# Altium PCB Controller.PcbDoc
Units mm, origin at the board's own origin, x right, y up, seen from the top; angles counter-clockwise.
Board outline 357.5 x 182.65 mm, 4 copper layers (Top Layer, Signal Layer 1, Signal Layer 2, Bottom Layer), stack 1.55 mm thick; 171 components, 66 nets, 596 pads, 118 vias.
Unrouted connection lines stored in the file: 415.
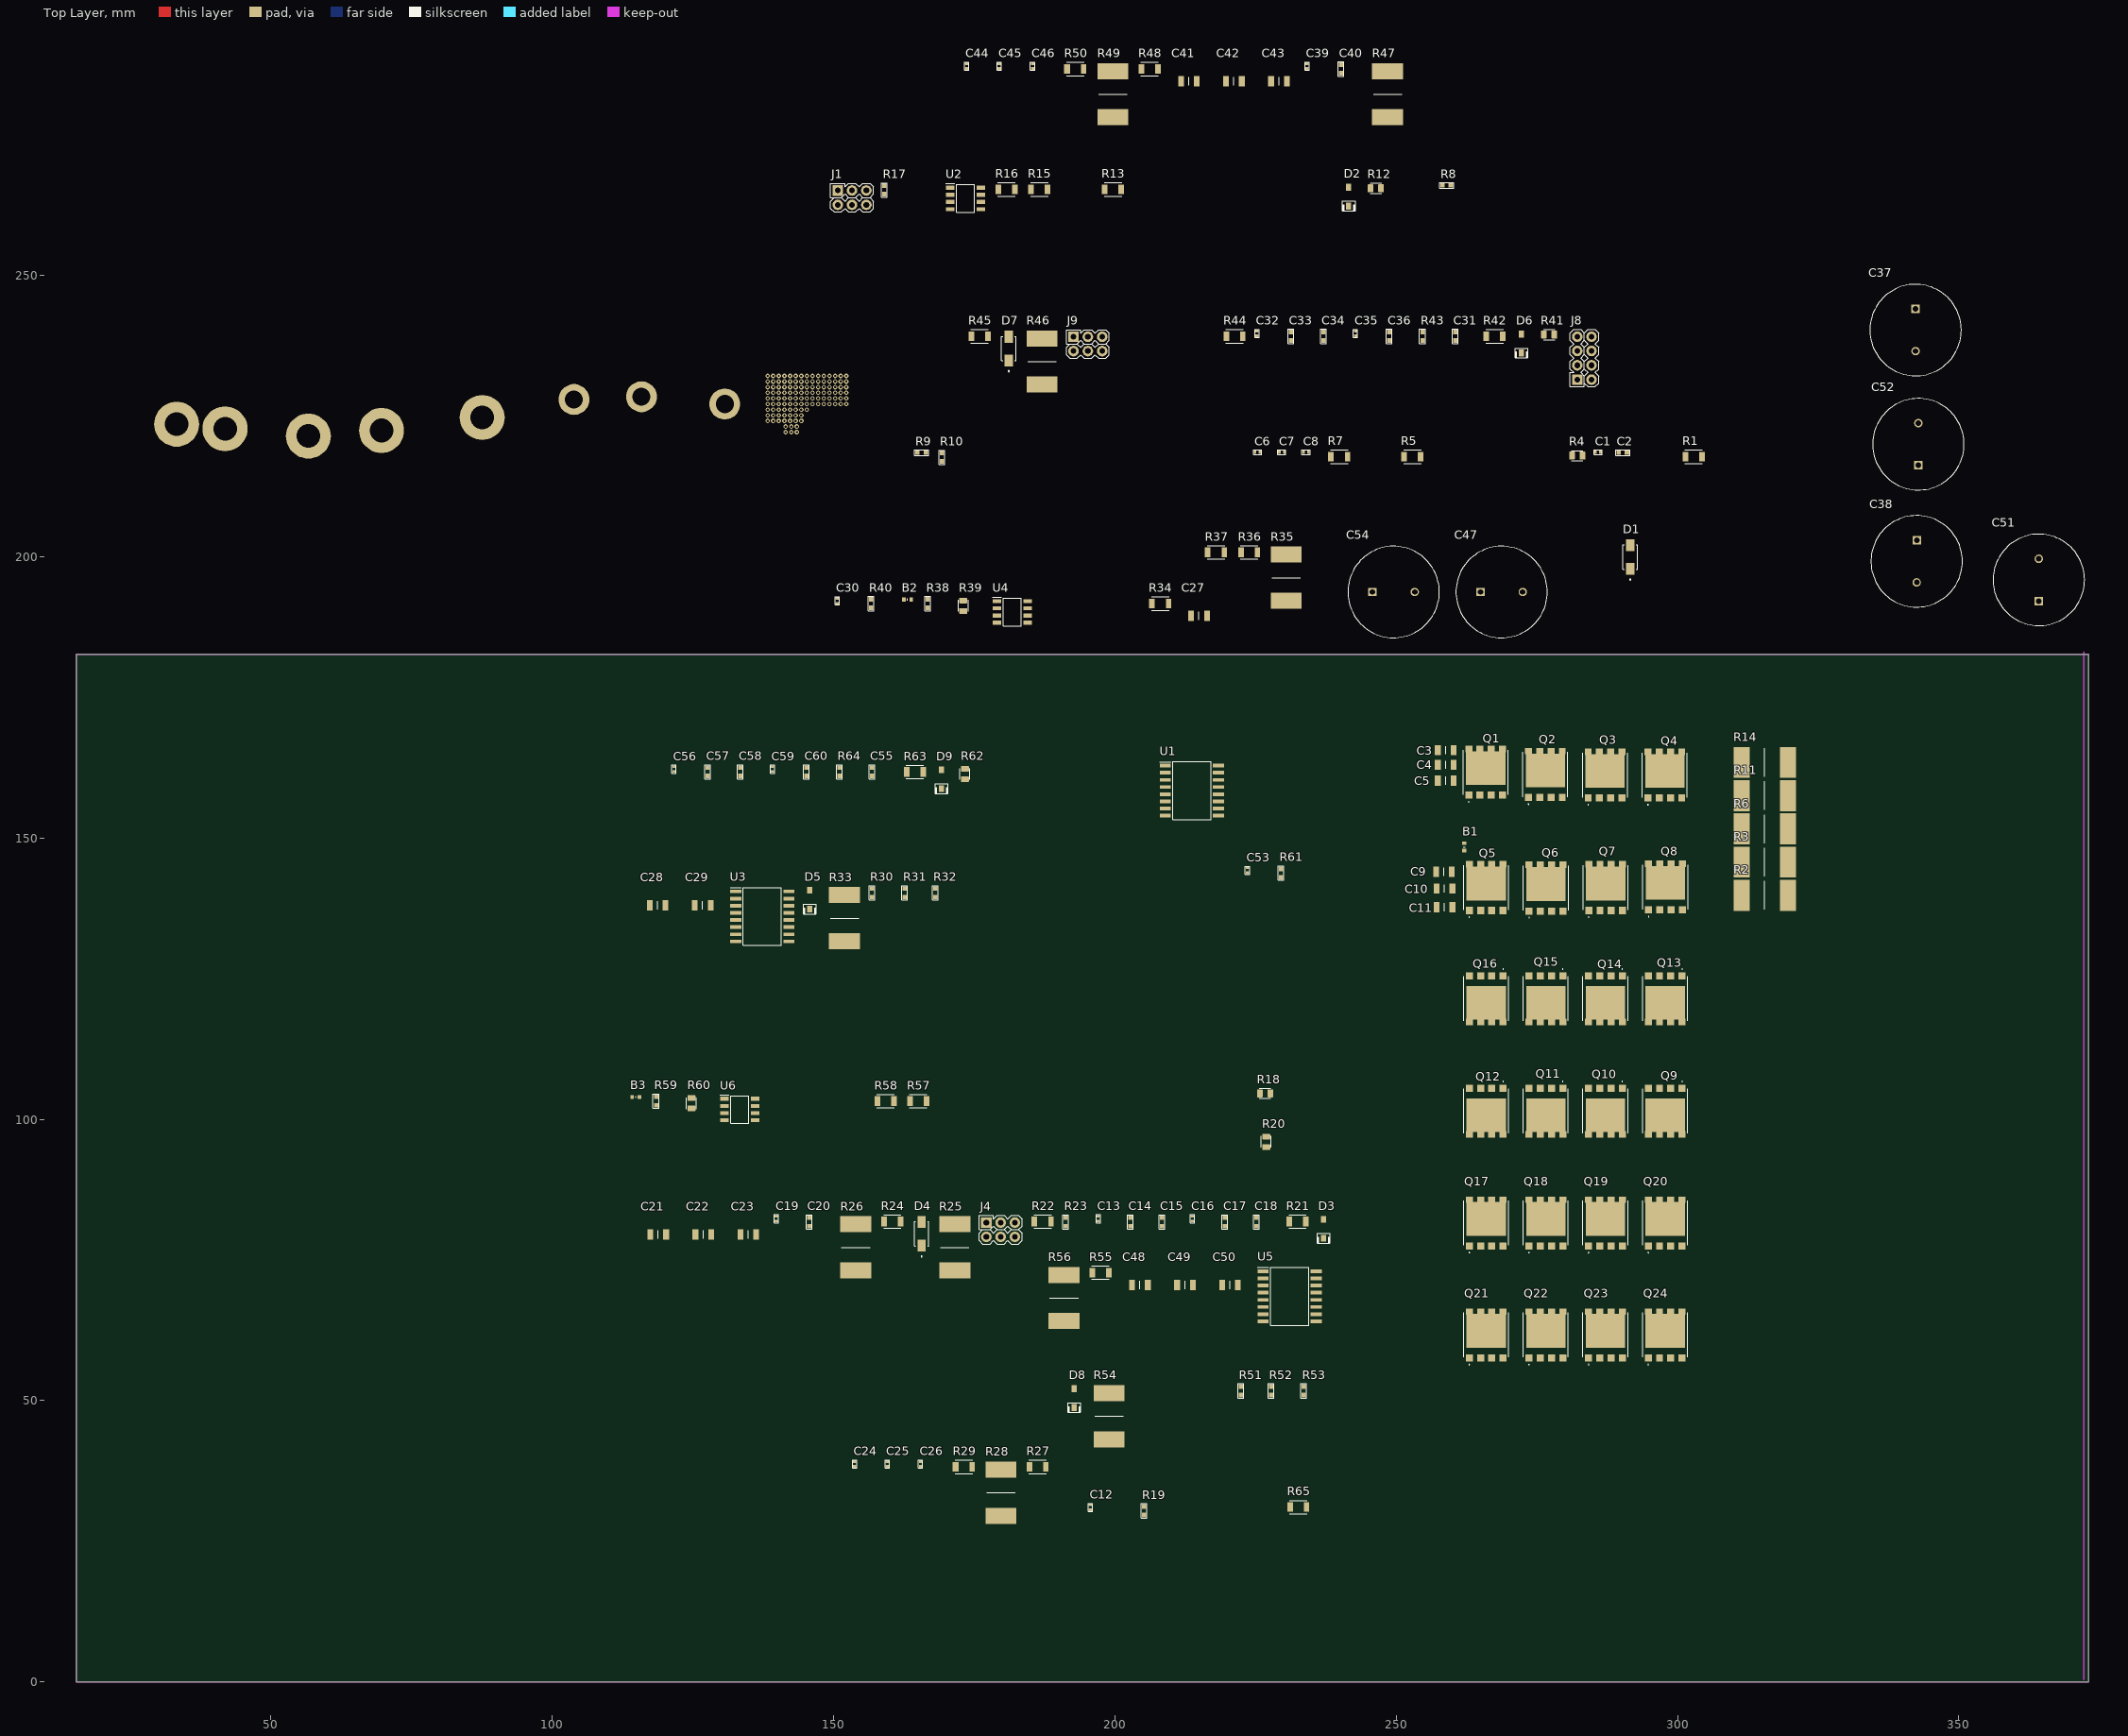
[diagram p0: Top Layer view]
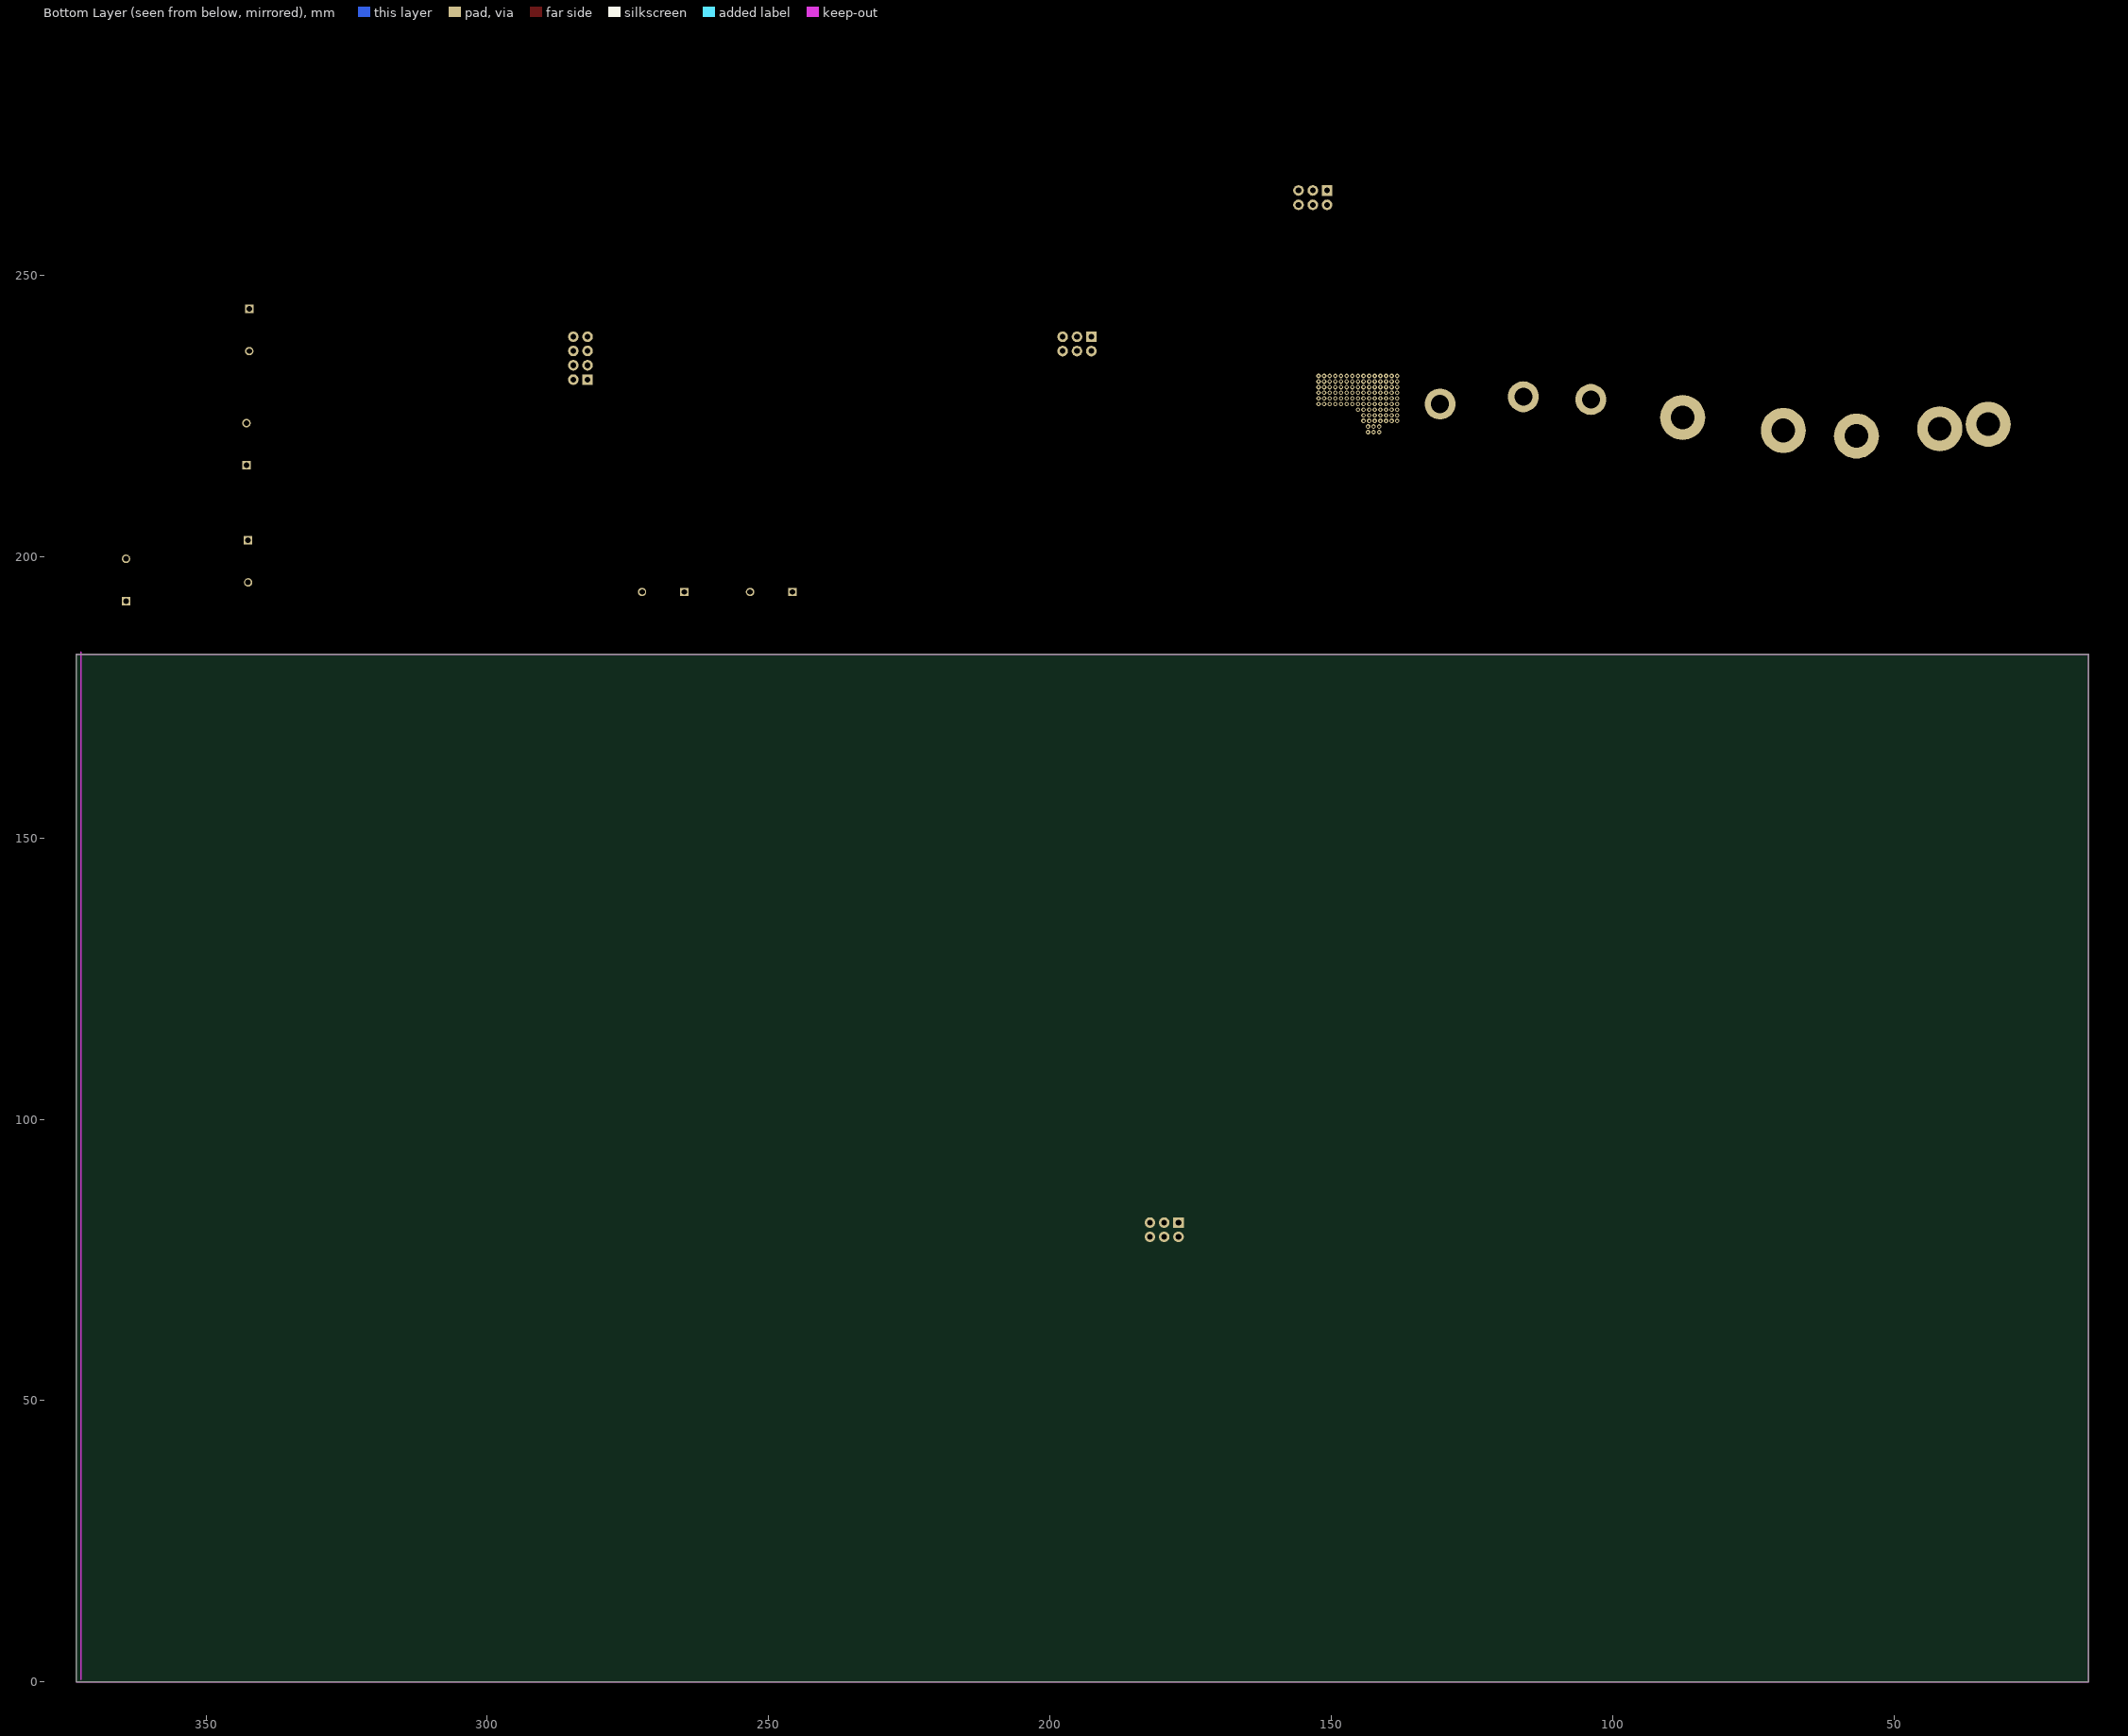
[diagram p1: Bottom Layer view, seen from below]

## Layer stack, top to bottom
Top Solder: solder mask 0.025, Solder Resist, Dk 3.5
Top Layer: signal copper 0.018
Dielectric 2: core 0.254, Dk 4.2
Signal Layer 1: signal copper 0.036
Dielectric 4: core 0.934, Dk 4.2
Signal Layer 2: signal copper 0.036
Dielectric 3: core 0.254, Dk 4.2
Bottom Layer: signal copper 0.018
Bottom Solder: solder mask 0.025, Solder Resist, Dk 3.5

## Board outline
15.5,0 15.5,182.648 373,182.648 373,0.008 372.992,0

## Design rules (kind name [scope] priority, off if disabled: settings)
AssemblyTestPointUsage AssemblyTestPointUsage_1 [All] p2:
AssemblyTestpoint AssemblyTestpoint_1 [All] p1: testpointundercomponent=TRUE minsize=1.016 maxsize=2.54 preferedsize=1.524 minholesize=0 maxholesize=1.016 preferedholesize=0.813 testpointgrid=0.025 usegrid=TRUE gridtolerance=0 allowsidetop=TRUE allowsidebottom=TRUE
Clearance Clearance_1 [All] p1: gap=0.5 ignorepadtopadclearanceinfootprint=FALSE except(0: Arc-Hole Track-Hole SMDPad-Hole THPad-Hole Via-Hole Fill-Hole Poly-Hole Region-Hole Text-Hole; 0.2: Arc-Arc Arc-Track Arc-SMDPad Arc-THPad Arc-Via Track-Track Track-SMDPad Track-THPad Track-Via SMDPad-SMDPad SMDPad-THPad SMDPad-Via THPad-THPad THPad-Via Via-Via)
ComponentClearance ComponentClearance_1 [All] p1: gap=0.2 collisioncheckmode=3 verticalgap=0.2 showdistances=TRUE
DiffPairsRouting DiffPairsRouting_1 [All] p1: maxlimit=0.254 minlimit=0.254 mostfreqgap=0.254 substack1={0391787D-B3DB-4B16-B312-97C439599AB4} toplayer_{0391787d-b3db-4b16-b312-97c439599ab4}_minwidth=0.381 toplayer_{0391787d-b3db-4b16-b312-97c439599ab4}_maxwidth=0.381 toplayer_{0391787d-b3db-4b16-b312-97c439599ab4}_prefwidth=0.381 midlayer1_{0391787d-b3db-4b16-b312-97c439599ab4}_minwidth=0.381 midlayer1_{0391787d-b3db-4b16-b312-97c439599ab4}_maxwidth=0.381 midlayer1_{0391787d-b3db-4b16-b312-97c439599ab4}_prefwidth=0.381 midlayer2_{0391787d-b3db-4b16-b312-97c439599ab4}_minwidth=0.381 midlayer2_{0391787d-b3db-4b16-b312-97c439599ab4}_maxwidth=0.381 midlayer2_{0391787d-b3db-4b16-b312-97c439599ab4}_prefwidth=0.381 bottomlayer_{0391787d-b3db-4b16-b312-97c439599ab4}_minwidth=0.381 bottomlayer_{0391787d-b3db-4b16-b312-97c439599ab4}_maxwidth=0.381 bottomlayer_{0391787d-b3db-4b16-b312-97c439599ab4}_prefwidth=0.381 substack2={0E55BCC6-0461-4BB8-A6DB-68FAAC3CF03A} toplayer_{0e55bcc6-0461-4bb8-a6db-68faac3cf03a}_minwidth=0.381 toplayer_{0e55bcc6-0461-4bb8-a6db-68faac3cf03a}_maxwidth=0.381 toplayer_{0e55bcc6-0461-4bb8-a6db-68faac3cf03a}_prefwidth=0.381 midlayer1_{0e55bcc6-0461-4bb8-a6db-68faac3cf03a}_minwidth=0.381 midlayer1_{0e55bcc6-0461-4bb8-a6db-68faac3cf03a}_maxwidth=0.381 midlayer1_{0e55bcc6-0461-4bb8-a6db-68faac3cf03a}_prefwidth=0.381 midlayer2_{0e55bcc6-0461-4bb8-a6db-68faac3cf03a}_minwidth=0.381 midlayer2_{0e55bcc6-0461-4bb8-a6db-68faac3cf03a}_maxwidth=0.381 midlayer2_{0e55bcc6-0461-4bb8-a6db-68faac3cf03a}_prefwidth=0.381 bottomlayer_{0e55bcc6-0461-4bb8-a6db-68faac3cf03a}_minwidth=0.381 bottomlayer_{0e55bcc6-0461-4bb8-a6db-68faac3cf03a}_maxwidth=0.381 bottomlayer_{0e55bcc6-0461-4bb8-a6db-68faac3cf03a}_prefwidth=0.381 substack3={7F91D735-8F98-4998-8FBE-C2B075826548} toplayer_{7f91d735-8f98-4998-8fbe-c2b075826548}_minwidth=0.381 toplayer_{7f91d735-8f98-4998-8fbe-c2b075826548}_maxwidth=0.381 toplayer_{7f91d735-8f98-4998-8fbe-c2b075826548}_prefwidth=0.381 midlayer1_{7f91d735-8f98-4998-8fbe-c2b075826548}_minwidth=0.381 midlayer1_{7f91d735-8f98-4998-8fbe-c2b075826548}_maxwidth=0.381 midlayer1_{7f91d735-8f98-4998-8fbe-c2b075826548}_prefwidth=0.381 midlayer2_{7f91d735-8f98-4998-8fbe-c2b075826548}_minwidth=0.381 midlayer2_{7f91d735-8f98-4998-8fbe-c2b075826548}_maxwidth=0.381 midlayer2_{7f91d735-8f98-4998-8fbe-c2b075826548}_prefwidth=0.381 bottomlayer_{7f91d735-8f98-4998-8fbe-c2b075826548}_minwidth=0.381 bottomlayer_{7f91d735-8f98-4998-8fbe-c2b075826548}_maxwidth=0.381 bottomlayer_{7f91d735-8f98-4998-8fbe-c2b075826548}_prefwidth=0.381 substack4={4ED4D01E-40BF-4D50-BA5A-F23A5EC9E761} toplayer_{4ed4d01e-40bf-4d50-ba5a-f23a5ec9e761}_minwidth=0.381 toplayer_{4ed4d01e-40bf-4d50-ba5a-f23a5ec9e761}_maxwidth=0.381 toplayer_{4ed4d01e-40bf-4d50-ba5a-f23a5ec9e761}_prefwidth=0.381 midlayer1_{4ed4d01e-40bf-4d50-ba5a-f23a5ec9e761}_minwidth=0.381 midlayer1_{4ed4d01e-40bf-4d50-ba5a-f23a5ec9e761}_maxwidth=0.381 midlayer1_{4ed4d01e-40bf-4d50-ba5a-f23a5ec9e761}_prefwidth=0.381 midlayer2_{4ed4d01e-40bf-4d50-ba5a-f23a5ec9e761}_minwidth=0.381 midlayer2_{4ed4d01e-40bf-4d50-ba5a-f23a5ec9e761}_maxwidth=0.381 midlayer2_{4ed4d01e-40bf-4d50-ba5a-f23a5ec9e761}_prefwidth=0.381 bottomlayer_{4ed4d01e-40bf-4d50-ba5a-f23a5ec9e761}_minwidth=0.381 bottomlayer_{4ed4d01e-40bf-4d50-ba5a-f23a5ec9e761}_maxwidth=0.381 bottomlayer_{4ed4d01e-40bf-4d50-ba5a-f23a5ec9e761}_prefwidth=0.381 substack5={57BA5FAC-A096-47A8-A9C3-28502E285703} toplayer_{57ba5fac-a096-47a8-a9c3-28502e285703}_minwidth=0.381 toplayer_{57ba5fac-a096-47a8-a9c3-28502e285703}_maxwidth=0.381 toplayer_{57ba5fac-a096-47a8-a9c3-28502e285703}_prefwidth=0.381 midlayer1_{57ba5fac-a096-47a8-a9c3-28502e285703}_minwidth=0.381 midlayer1_{57ba5fac-a096-47a8-a9c3-28502e285703}_maxwidth=0.381 midlayer1_{57ba5fac-a096-47a8-a9c3-28502e285703}_prefwidth=0.381 midlayer2_{57ba5fac-a096-47a8-a9c3-28502e285703}_minwidth=0.381 midlayer2_{57ba5fac-a096-47a8-a9c3-28502e285703}_maxwidth=0.381 midlayer2_{57ba5fac-a096-47a8-a9c3-28502e285703}_prefwidth=0.381 bottomlayer_{57ba5fac-a096-47a8-a9c3-28502e285703}_minwidth=0.381 bottomlayer_{57ba5fac-a096-47a8-a9c3-28502e285703}_maxwidth=0.381 bottomlayer_{57ba5fac-a096-47a8-a9c3-28502e285703}_prefwidth=0.381 toplayer_minwidth=0.381 toplayer_maxwidth=0.381 toplayer_prefwidth=0.381 midlayer1_minwidth=0.381 midlayer1_maxwidth=0.381 midlayer1_prefwidth=0.381 midlayer2_minwidth=0.381 midlayer2_maxwidth=0.381 midlayer2_prefwidth=0.381 bottomlayer_minwidth=0.381 bottomlayer_maxwidth=0.381 bottomlayer_prefwidth=0.381 substack6={B351C19E-D50C-4F2F-B5BB-791B69F230FF} toplayer_{b351c19e-d50c-4f2f-b5bb-791b69f230ff}_minwidth=0.381 toplayer_{b351c19e-d50c-4f2f-b5bb-791b69f230ff}_maxwidth=0.381 toplayer_{b351c19e-d50c-4f2f-b5bb-791b69f230ff}_prefwidth=0.381 midlayer1_{b351c19e-d50c-4f2f-b5bb-791b69f230ff}_minwidth=0.381 midlayer1_{b351c19e-d50c-4f2f-b5bb-791b69f230ff}_maxwidth=0.381 midlayer1_{b351c19e-d50c-4f2f-b5bb-791b69f230ff}_prefwidth=0.381 midlayer2_{b351c19e-d50c-4f2f-b5bb-791b69f230ff}_minwidth=0.381 midlayer2_{b351c19e-d50c-4f2f-b5bb-791b69f230ff}_maxwidth=0.381 midlayer2_{b351c19e-d50c-4f2f-b5bb-791b69f230ff}_prefwidth=0.381 bottomlayer_{b351c19e-d50c-4f2f-b5bb-791b69f230ff}_minwidth=0.381 bottomlayer_{b351c19e-d50c-4f2f-b5bb-791b69f230ff}_maxwidth=0.381 bottomlayer_{b351c19e-d50c-4f2f-b5bb-791b69f230ff}_prefwidth=0.381 substack7={2F1B6B62-C7FD-47FC-965D-ED7560D8E9E8} toplayer_{2f1b6b62-c7fd-47fc-965d-ed7560d8e9e8}_minwidth=0.381 toplayer_{2f1b6b62-c7fd-47fc-965d-ed7560d8e9e8}_maxwidth=0.381 toplayer_{2f1b6b62-c7fd-47fc-965d-ed7560d8e9e8}_prefwidth=0.381 midlayer1_{2f1b6b62-c7fd-47fc-965d-ed7560d8e9e8}_minwidth=0.381 midlayer1_{2f1b6b62-c7fd-47fc-965d-ed7560d8e9e8}_maxwidth=0.381 midlayer1_{2f1b6b62-c7fd-47fc-965d-ed7560d8e9e8}_prefwidth=0.381 midlayer2_{2f1b6b62-c7fd-47fc-965d-ed7560d8e9e8}_minwidth=0.381 midlayer2_{2f1b6b62-c7fd-47fc-965d-ed7560d8e9e8}_maxwidth=0.381 midlayer2_{2f1b6b62-c7fd-47fc-965d-ed7560d8e9e8}_prefwidth=0.381 bottomlayer_{2f1b6b62-c7fd-47fc-965d-ed7560d8e9e8}_minwidth=0.381 bottomlayer_{2f1b6b62-c7fd-47fc-965d-ed7560d8e9e8}_maxwidth=0.381 bottomlayer_{2f1b6b62-c7fd-47fc-965d-ed7560d8e9e8}_prefwidth=0.381 substack8={A0CE5E7A-17C9-422A-884C-87F0A86ADDD9} toplayer_{a0ce5e7a-17c9-422a-884c-87f0a86addd9}_minwidth=0.381 toplayer_{a0ce5e7a-17c9-422a-884c-87f0a86addd9}_maxwidth=0.381 toplayer_{a0ce5e7a-17c9-422a-884c-87f0a86addd9}_prefwidth=0.381 midlayer1_{a0ce5e7a-17c9-422a-884c-87f0a86addd9}_minwidth=0.381 midlayer1_{a0ce5e7a-17c9-422a-884c-87f0a86addd9}_maxwidth=0.381 midlayer1_{a0ce5e7a-17c9-422a-884c-87f0a86addd9}_prefwidth=0.381 midlayer2_{a0ce5e7a-17c9-422a-884c-87f0a86addd9}_minwidth=0.381 midlayer2_{a0ce5e7a-17c9-422a-884c-87f0a86addd9}_maxwidth=0.381 midlayer2_{a0ce5e7a-17c9-422a-884c-87f0a86addd9}_prefwidth=0.381 bottomlayer_{a0ce5e7a-17c9-422a-884c-87f0a86addd9}_minwidth=0.381 bottomlayer_{a0ce5e7a-17c9-422a-884c-87f0a86addd9}_maxwidth=0.381 bottomlayer_{a0ce5e7a-17c9-422a-884c-87f0a86addd9}_prefwidth=0.381 maxuncoupledlength=12.7
FabricationTestPointUsage FabricationTestPointUsage_1 [All] p1: valid=0 allowmultiple=FALSE
FabricationTestpoint FabricationTestpoint_1 [All] p1: side=3 testpointundercomponent=TRUE minsize=1.016 maxsize=2.54 preferedsize=1.524 minholesize=0 maxholesize=1.016 preferedholesize=0.813 testpointgrid=0.025 allowsidetop=TRUE allowsidebottom=TRUE usegrid=TRUE gridtolerance=0
FanoutControl Fanout_BGA_1 [IsBGA] p1: bgadir=Out bgaviamode=Centered fanoutstyle=Auto fanoutdirection=Alternating viagrid=0.025 // Fanout_BGA (Default Rule)
FanoutControl Fanout_LCC_1 [IsLCC] p2: bgadir=Out bgaviamode=Centered fanoutstyle=Auto fanoutdirection=Alternating viagrid=0.025 // Fanout_LCC (Default Rule)
FanoutControl Fanout_SOIC_1 [IsSOIC] p3: bgadir=Out bgaviamode=Centered fanoutstyle=Auto fanoutdirection=Alternating viagrid=0.025 // Fanout_SOIC (Default Rule)
FanoutControl Fanout_Small_1 [(CompPinCount < 5)] p4: bgadir=Out bgaviamode=Centered fanoutstyle=Auto fanoutdirection=OutThenIn viagrid=0.025 // Fanout_Small (Default Rule)
FanoutControl Fanout_Default_1 [All] p5: bgadir=Out bgaviamode=Centered fanoutstyle=Auto fanoutdirection=Alternating viagrid=0.025 // Fanout_Default (Default Rule)
Height Height_1 [All] p1: minheight=0 maxheight=25.4 prefheight=12.7
HoleSize HoleSize_1 [All] p1: absolutevalues=TRUE maxlimit=5 minlimit=0.3 maxpercent=80.000 minpercent=20.000
HoleToHoleClearance HoleToHoleClearance_1 [All] p1: gap=0.254 allowstackedmicrovias=TRUE
LayerPairs LayerPairs_1 [All] p1: enforce=TRUE
MinimumSolderMaskSliver MinimumSolderMaskSliver_1 [All] p1: minsoldermaskwidth=0.1
NetAntennae NetAntennae_1 [InNetClass('VIN')] p1: netantennaetolerance=0
PasteMaskExpansion PasteMaskExpansion_1 [All] p1: expansion=0
PlaneClearance PlaneClearance_1 [All] p1: clearance=0.508
PlaneConnect PlaneConnect_1 [All] p1: planeconnectstyle=Relief reliefexpansion=0.508 reliefentries=4 reliefconductorwidth=0.254 reliefairgap=0.254
PolygonConnect PolygonConnect_1 [All] p1: connectstyle=Direct reliefconductorwidth=0.254 reliefentries=4 polygonreliefangle="90 Angle" airgapwidth=0.254
RoomDefinition PowerBoard [InComponentClass('PowerBoard')] p1: confinementstyle=ConfineOut formatcopy=TRUE lockcomponents=FALSE outline 249.8,-11.936 273.5,-11.936 273.5,-6.5 249.8,-6.5
RoutingCorners RoutingCorners_1 [All] p1: cornerstyle=45-Degree minsetback=2.54 maxsetback=2.54
RoutingLayers RoutingLayers_1 [All] p1: top layer_v5=TRUE mid layer 1_v5=TRUE mid layer 2_v5=TRUE bottom layer_v5=TRUE
RoutingPriority RoutingPriority_1 [All] p1: routingpriority=0
RoutingTopology RoutingTopology_1 [All] p1: topology=Shortest
RoutingVias RoutingVias_1 [All] p1: holewidth=0.4 width=0.8 viastyle="Through Hole" minholewidth=0.3 minwidth=0.6 maxholewidth=5 maxwidth=10
ShortCircuit ShortCircuit_1 [All] p1: allowed=FALSE
SilkToBoardRegionClearance SilkToBoardRegionClearance_1 [All] p2:
SilkToSilkClearance SilkToSilkClearance_1 [All] p1: silktosilkclearance=0
SilkToSolderMaskClearance SilkToSolderMaskClearance_1 [IsPad] p1: minsilkscreentomaskgap=0 clearancetoexposedcopper=TRUE
SolderMaskExpansion SolderMaskExpansion_1 [All] p1: expansion=0.102 istentingtop=FALSE
UnRoutedNet UnRoutedNet_1 [All] p1:
UnpouredPolygon UnpouredPolygon_1 [All] p1:
Width Width_1 [All] p1: maxlimit=3.048 minlimit=0.2 preferedwidth=0.254 substack1={0391787D-B3DB-4B16-B312-97C439599AB4} substack2={0E55BCC6-0461-4BB8-A6DB-68FAAC3CF03A} substack3={7F91D735-8F98-4998-8FBE-C2B075826548} substack4={4ED4D01E-40BF-4D50-BA5A-F23A5EC9E761} substack5={57BA5FAC-A096-47A8-A9C3-28502E285703} substack6={B351C19E-D50C-4F2F-B5BB-791B69F230FF} substack7={2F1B6B62-C7FD-47FC-965D-ED7560D8E9E8} substack8={A0CE5E7A-17C9-422A-884C-87F0A86ADDD9}
2 further rules are at their usual default settings.

## Components (designator, comment, footprint, x,y, rotation, side; value= is the part's Value field where it differs from the comment)
B1 "NTCS0402E3103GL1T" THRMC1005X65N 262.1,148.4 r90 top
B2 "NTCS0402E3103GL1T" THRMC1005X65N 163.174,192.345 r0 top
B3 "NTCS0402E3103GL1T" THRMC1005X65N 114.875,103.945 r0 top
C1 "100nF" C0402 285.874,218.545 r0 top
C2 "4.7uF" C0603 290.274,218.445 r0 top
C3 "2.2uF 100V" CAPC3216X178N 258.8,165.6 r0 top
C4 "2.2uF 100V" CAPC3216X178N 258.8,163 r0 top
C5 "2.2uF 100V" CAPC3216X178N 258.8,160.2 r0 top
C6 "100nF" C0402 225.374,218.545 r0 top
C7 "100nF" C0402 229.674,218.545 r0 top
C8 "100nF" C0402 233.974,218.545 r0 top
C9 "2.2uF 100V" CAPC3216X178N 258.5,144 r180 top
C10 "2.2uF 100V" CAPC3216X178N 258.6,141 r180 top
C11 "2.2uF 100V" CAPC3216X178N 258.6,137.7 r180 top
C12 "100nF" C0402 195.674,31.045 r90 top
C13 "100nF" C0402 197.075,82.345 r90 top
C14 "2.2uF" C0603 202.775,81.745 r90 top
C15 "4.7uF" C0603 208.375,81.745 r90 top
C16 "100nF" C0402 213.775,82.345 r90 top
C17 "2.2uF" C0603 219.575,81.745 r90 top
C18 "2.2uF" C0603 225.175,81.745 r90 top
C19 "100nF" C0402 139.875,82.345 r90 top
C20 "4.7uF" C0603 145.675,81.745 r90 top
C21 "2.2uF 100V" CAPC3216X178N 118.875,79.545 r0 top
C22 "2.2uF 100V" CAPC3216X178N 126.875,79.545 r0 top
C23 "2.2uF 100V" CAPC3216X178N 134.875,79.545 r0 top
C24 "100nF" C0402 153.775,38.745 r90 top
C25 "100nF" C0402 159.575,38.745 r90 top
C26 "100nF" C0402 165.475,38.745 r90 top
C27 "2.2uF 100V" CAPC3216X178N 214.974,189.445 r0 top
C28 "2.2uF 100V" CAPC3216X178N 118.775,138.045 r0 top
C29 "2.2uF 100V" CAPC3216X178N 126.775,138.045 r0 top
C30 "100nF" C0402 150.674,192.145 r90 top
C31 "2.2uF" C0603 260.474,239.145 r90 top
C32 "100nF" C0402 225.274,239.645 r90 top
C33 "2.2uF" C0603 231.274,239.145 r90 top
C34 "4.7uF" C0603 237.074,239.145 r90 top
C35 "100nF" C0402 242.774,239.645 r90 top
C36 "2.2uF" C0603 248.774,239.145 r90 top
C37 "470uF 100V" CAPPRD750W80D1625H4150 342.3,244 r270 top
C38 "470uF 100V" CAPPRD750W80D1625H4150 342.5,202.9 r270 top
C39 "100nF" C0402 234.174,287.145 r90 top
C40 "4.7uF" C0603 240.174,286.645 r90 top
C41 "2.2uF 100V" CAPC3216X178N 213.174,284.445 r0 top
C42 "2.2uF 100V" CAPC3216X178N 221.174,284.445 r0 top
C43 "2.2uF 100V" CAPC3216X178N 229.174,284.445 r0 top
C44 "100nF" C0402 173.674,287.145 r90 top
C45 "100nF" C0402 179.474,287.145 r90 top
C46 "100nF" C0402 185.374,287.145 r90 top
C47 "470uF 100V" CAPPRD750W80D1625H4150 265,193.7 r0 top
C48 "2.2uF 100V" CAPC3216X178N 204.475,70.545 r0 top
C49 "2.2uF 100V" CAPC3216X178N 212.475,70.545 r0 top
C50 "2.2uF 100V" CAPC3216X178N 220.475,70.545 r0 top
C51 "470uF 100V" CAPPRD750W80D1625H4150 364.2,192.1 r90 top
C52 "470uF 100V" CAPPRD750W80D1625H4150 342.8,216.2 r90 top
C53 "100nF" C0402 223.575,144.245 r90 top
C54 "470uF 100V" CAPPRD750W80D1625H4150 245.8,193.7 r0 top
C55 "2.2uF" C0603 156.875,161.745 r90 top
C56 "100nF" C0402 121.675,162.245 r90 top
C57 "2.2uF" C0603 127.675,161.745 r90 top
C58 "4.7uF" C0603 133.475,161.745 r90 top
C59 "100nF" C0402 139.175,162.245 r90 top
C60 "2.2uF" C0603 145.175,161.745 r90 top
D1 "SS115" DIOM4325X250N 291.6,199.9 r90 top value="1A, 150V"
D2 "B140HW-7" SOD123 241.574,263.945 r90 top
D3 "B140HW-7" SOD123 237.075,80.545 r90 top
D4 "SS115" DIOM4325X250N 165.675,79.645 r90 top value="1A, 150V"
D5 "B140HW-7" SOD123 145.775,139.045 r90 top
D6 "B140HW-7" SOD123 272.274,237.845 r90 top
D7 "SS115" DIOM4325X250N 181.174,236.945 r90 top value="1A, 150V"
D8 "B140HW-7" SOD123 192.775,50.445 r90 top
D9 "B140HW-7" SOD123 169.175,160.445 r90 top
J1 "PHASE_U" 61300621121 150.774,265.045 r0 top value=61300621121
J4 "PHASE_V" 61300621121 177.175,81.645 r0 top value=61300621121
J8 "Header 8 Pin_2" 61300821121 282.174,231.445 r90 top value=61300821121
J9 "PHASE_W" 61300621121 192.674,239.045 r0 top value=61300621121
Q1 "NTMSC002N10MCTXG" NTMSC002N10MCTXG 265.9,162.515 r90 top
Q2 "NTMSC002N10MCTXG" NTMSC002N10MCTXG 276.514,162.115 r90 top
Q3 "NTMSC002N10MCTXG" NTMSC002N10MCTXG 287.129,162.015 r90 top
Q4 "NTMSC002N10MCTXG" NTMSC002N10MCTXG 297.743,162.02 r90 top
Q5 "NTMSC002N10MCTXG" NTMSC002N10MCTXG 266,142.015 r90 top
Q6 "NTMSC002N10MCTXG" NTMSC002N10MCTXG 276.614,141.915 r90 top
Q7 "NTMSC002N10MCTXG" NTMSC002N10MCTXG 287.229,142.015 r90 top
Q8 "NTMSC002N10MCTXG" NTMSC002N10MCTXG 297.843,142.115 r90 top
Q9 "NTMSC002N10MCTXG" NTMSC002N10MCTXG 297.8,100.6 r270 top
Q10 "NTMSC002N10MCTXG" NTMSC002N10MCTXG 287.2,100.6 r270 top
Q11 "NTMSC002N10MCTXG" NTMSC002N10MCTXG 276.6,100.6 r270 top
Q12 "NTMSC002N10MCTXG" NTMSC002N10MCTXG 266,100.6 r270 top
Q13 "NTMSC002N10MCTXG" NTMSC002N10MCTXG 297.8,120.58 r270 top
Q14 "NTMSC002N10MCTXG" NTMSC002N10MCTXG 287.2,120.58 r270 top
Q15 "NTMSC002N10MCTXG" NTMSC002N10MCTXG 276.6,120.58 r270 top
Q16 "NTMSC002N10MCTXG" NTMSC002N10MCTXG 266,120.58 r270 top
Q17 "NTMSC002N10MCTXG" NTMSC002N10MCTXG 266,82.415 r90 top
Q18 "NTMSC002N10MCTXG" NTMSC002N10MCTXG 276.6,82.415 r90 top
Q19 "NTMSC002N10MCTXG" NTMSC002N10MCTXG 287.2,82.415 r90 top
Q20 "NTMSC002N10MCTXG" NTMSC002N10MCTXG 297.8,82.415 r90 top
Q21 "NTMSC002N10MCTXG" NTMSC002N10MCTXG 266,62.515 r90 top
Q22 "NTMSC002N10MCTXG" NTMSC002N10MCTXG 276.6,62.515 r90 top
Q23 "NTMSC002N10MCTXG" NTMSC002N10MCTXG 287.2,62.515 r90 top
Q24 "NTMSC002N10MCTXG" NTMSC002N10MCTXG 297.8,62.515 r90 top
R1 "2.2R" R1206 302.874,217.745 r0 top
R2 "0.5mR/9W" RESC10052X137N 315.5,139.8 r180 top value="0.5ohm 9W"
R3 "0.5mR/9W" RESC10052X137N 315.5,145.7 r180 top value="0.5ohm 9W"
R4 "39k" R0805 282.174,217.945 r0 top
R5 "4.7R" R1206 252.874,217.745 r0 top
R6 "0.5mR/9W" RESC10052X137N 315.5,151.6 r180 top value="0.5ohm 9W"
R7 "20R" R1206 239.874,217.745 r0 top
R8 "2.2k" R0603 258.974,265.945 r0 top
R9 "2.2k" R0603 165.674,218.445 r0 top
R10 "2.2k" R0603 169.274,217.645 r90 top
R11 "0.5mR/9W" RESC10052X137N 315.5,157.5 r180 top value="0.5ohm 9W"
R12 "2.2k" R0805 246.374,265.445 r0 top
R13 "20R" R1206 199.674,265.245 r0 top
R14 "0.5mR/9W" RESC10052X137N 315.5,163.4 r180 top value="0.5ohm 9W"
R15 "20R" R1206 186.574,265.245 r0 top
R16 "20R" R1206 180.774,265.245 r0 top
R17 "1k" R0603 159.074,265.145 r90 top
R18 "39k" R0805 226.7,104.6 r0 top
R19 "10k" R0603 205.174,30.445 r90 top
R20 "2.2k" R0805 226.9,96 r90 top
R21 "20R" R1206 232.475,81.845 r0 top
R22 "4.7R" R1206 187.175,81.845 r0 top
R23 "10k" R0603 191.275,81.745 r90 top
R24 "2.2R" R1206 160.475,81.845 r0 top
R25 "0.5mR/9W" RESC10052X137N 171.575,77.245 r90 top value="0.5ohm 9W"
R26 "0.5mR/9W" RESC10052X137N 153.975,77.245 r90 top value="0.5ohm 9W"
R27 "4.7R" R1206 186.275,38.245 r0 top
R28 "0.5mR/9W" RESC10052X137N 179.775,33.645 r90 top value="0.5ohm 9W"
R29 "20R" R1206 173.175,38.245 r0 top
R30 "2.2k" R0603 156.875,140.245 r90 top
R31 "2.2k" R0603 162.675,140.245 r90 top
R32 "2.2k" R0603 168.075,140.245 r90 top
R33 "0.5mR/9W" RESC10052X137N 151.975,135.745 r90 top value="0.5ohm 9W"
R34 "20R" R1206 208.074,191.645 r0 top
R35 "0.5mR/9W" RESC10052X137N 230.474,196.245 r90 top value="0.5ohm 9W"
R36 "20R" R1206 223.874,200.745 r0 top
R37 "20R" R1206 217.974,200.745 r0 top
R38 "1k" R0603 166.774,191.645 r90 top
R39 "39k" R0805 173.074,191.245 r90 top
R40 "10k" R0603 156.674,191.645 r90 top
R41 "2.2k" R0805 277.174,239.445 r0 top
R42 "20R" R1206 267.474,239.145 r0 top
R43 "10k" R0603 254.674,239.145 r90 top
R44 "4.7R" R1206 221.274,239.145 r0 top
R45 "2.2R" R1206 175.974,239.145 r0 top
R46 "0.5mR/9W" RESC10052X137N 187.074,234.645 r90 top value="0.5ohm 9W"
R47 "0.5mR/9W" RESC10052X137N 248.474,282.145 r90 top value="0.5ohm 9W"
R48 "4.7R" R1206 206.174,286.645 r0 top
R49 "0.5mR/9W" RESC10052X137N 199.674,282.145 r90 top value="0.5ohm 9W"
R50 "20R" R1206 192.974,286.645 r0 top
R51 "2.2k" R0603 222.374,51.745 r90 top
R52 "2.2k" R0603 227.774,51.745 r90 top
R53 "2.2k" R0603 233.574,51.745 r90 top
R54 "0.5mR/9W" RESC10052X137N 198.974,47.245 r90 top value="0.5ohm 9W"
R55 "20R" R1206 197.475,72.745 r0 top
R56 "0.5mR/9W" RESC10052X137N 190.975,68.245 r90 top value="0.5ohm 9W"
R57 "20R" R1206 165.075,103.245 r0 top
R58 "20R" R1206 159.275,103.245 r0 top
R59 "1k" R0603 118.475,103.245 r90 top
R60 "39k" R0805 124.775,102.845 r90 top
R61 "10k" R0603 229.575,143.745 r90 top
R62 "2.2k" R0805 173.375,161.345 r90 top
R63 "20R" R1206 164.475,161.745 r0 top
R64 "10k" R0603 151.075,161.745 r90 top
R65 "4.7R" R1206 232.6,31.1 r0 top
U1 "UCC21520ADW" SOIC127P1030X265-16N 213.7,158.4 r0 top
U2 "INA240A2QDRQ1" SOIC127P600X175-8N 173.474,263.645 r0 top
U3 "UCC21520ADW" SOIC127P1030X265-16N 137.375,136.045 r0 top
U4 "INA240A2QDRQ1" SOIC127P600X175-8N 181.774,190.145 r0 top
U5 "UCC21520ADW" SOIC127P1030X265-16N 231.075,68.545 r0 top
U6 "INA240A2QDRQ1" SOIC127P600X175-8N 133.375,101.745 r0 top

## Footprints (in the part's own frame and the unit in brackets; to place one, negate y for a bottom-side part, rotate by r counter-clockwise, add the part's x,y. Pads: shape width x height; smd on the part's side, far side on the other; paste and mask are expansions set on the pad)
61300621121 [mil]
  rect 74x74 hole 40: 1(0,0)
  round 74 hole 40: 2(100,0) 3(200,0) 4(0,-100) 5(100,-100) 6(200,-100)
  silkscreen extent -50,-150 250,50, body extent -50,-150 250,50, height 350
61300821121 [mil]
  rect 74x74 hole 40: 1(0,0)
  round 74 hole 40: 2(100,0) 3(200,0) 4(300,0) 5(0,-100) 6(100,-100) 7(200,-100) 8(300,-100)
  silkscreen extent -50,-150 350,50, body extent -50,-150 350,50, height 118
C0402 [mm]
  rect 0.45x0.6 smd: 1(-0.432,0) 2(0.432,0)
  silkscreen extent -0.73,-0.4 0.73,0.39, body extent -0.49,-0.27 0.51,0.28, height 0.5
C0603 [mm] "CAPACITOR SMD 0603"
  rect 0.8x0.75 smd: 1(-0.75,0) 2(0.75,0)
  silkscreen extent -1.27,-0.51 1.27,0.51, body extent -1,-0.39 1,0.39, height 0.79
CAPC3216X178N [mm]
  rect 1.02x1.82 smd: 1(-1.4,0) 2(1.4,0)
  silkscreen extent 0,-0.7 0,0.7, body extent -1.6,-0.8 1.6,0.8, height 1.78
CAPPRD750W80D1625H4150 [mm]
  rect 1.5x1.5 hole 1: 1(0,0)
  round 1.5 hole 1: 2(7.5,0)
  silkscreen extent -4.37,-8.12 11.87,8.13, body extent -4.5,-8.25 12,8.25, height 41.5
DIOM4325X250N [mm]
  rect 2.12x1.5 smd: A(2.115,0) C(-2.115,0)
  silkscreen extent -4.1,-1.28 2.16,1.28, body extent -2.57,-1.28 2.57,1.28, height 2.5
NTMSC002N10MCTXG [mm]
  rect 6x7 smd: DRAIN(-0.12,0)
  rect 1.15x1.25 smd: DRAIN(3.295,-3) DRAIN(3.295,-1) DRAIN(3.295,1) DRAIN(3.295,3)
  rect 1.28x1.25 smd: GATE(-4.915,3) SOURCE(-4.915,-3) SOURCE(-4.915,-1) SOURCE(-4.915,1)
  silkscreen extent -6.16,-4 3.11,4, body extent -5.03,-4.15 3.37,4.15, height 1.02
R0603 [mm] "RESISTOR SMD 0603"
  rect 0.8x0.75 smd: 1(-0.75,0) 2(0.75,0)
  silkscreen extent -1.27,-0.51 1.27,0.51, body extent -1,-0.39 1,0.39, height 0.79
R0805 [mm]
  rrect25% 1x1.42 smd: 1(-0.935,0) 2(0.935,0)
  silkscreen extent -1,-0.89 1,0.89
R1206 [mm]
  rect 1.02x1.73 smd: 1(-1.455,0)
  rect 0.97x1.73 smd: 2(1.48,0)
  silkscreen extent -1.55,-1.18 1.55,1.18, body extent -1.6,-0.8 1.6,0.8, height 0.7
RESC10052X137N [mm]
  rect 2.85x5.5 smd: 1(-4.1,0) 2(4.1,0)
  silkscreen extent 0,-2.52 0,2.52, body extent -5,-2.63 5,2.63, height 1.37
SOD123 [mm]
  rect 1.21x0.93 smd: A(1.68,0) C(-1.68,0)
  silkscreen extent -2.54,-1.1 -0.8,1.1, body extent -1.85,-0.8 1.85,0.8, height 1.27
SOIC127P600X175-8N [mm]
  rect 1.55x0.7 smd: 1(-2.725,1.905) 2(-2.725,0.635) 3(-2.725,-0.635) 4(-2.725,-1.905) 5(2.725,-1.905) 6(2.725,-0.635) 7(2.725,0.635) 8(2.725,1.905)
  silkscreen extent -3.5,-2.45 1.6,2.61, body extent -3,-2.45 3,2.45, height 1.75
SOIC127P1030X265-16N [mm]
  rect 1.95x0.65 smd: 1(-4.725,4.445) 2(-4.725,3.175) 3(-4.725,1.905) 4(-4.725,0.635) 5(-4.725,-0.635) 6(-4.725,-1.905) 7(-4.725,-3.175) 8(-4.725,-4.445) 9(4.725,-4.445) 10(4.725,-3.175) 11(4.725,-1.905) 12(4.725,-0.635) 13(4.725,0.635) 14(4.725,1.905) 15(4.725,3.175) 16(4.725,4.445)
  silkscreen extent -5.7,-5.15 3.4,5.15, body extent -5.17,-5.15 5.17,5.15, height 2.59
THRMC1005X65N [mm]
  rect 0.65x0.7 smd: 1(-0.65,0) 2(0.65,0)
  silkscreen extent 0,-0.15 0,0.15, body extent -0.5,-0.25 0.5,0.25, height 0.65

## Part data
B1 B2 B3: "NTC Thermistors 10Kohms 2% AEC-Q200", Manufacturer=Vishay, Supplier Part Number=594-NTCS402E3103GL1T, Manufacturer Part Number=NTCS0402E3103GL1T, Price=0.47, Supplier=Mouser
C1 C6 C7 C8 C12 C13 C16 C19 C24 C25 C26 C30 C32 C35 C39 C44 C45 C46 C53 C56 C59: library part "100nF ± 10% 50V", "100nF ± 10% 50V", Manufacturer=Yageo, Manufacturer Part Number=CS0603KRX7R9BB104, Supplier Part Number=603-CS0603KRX79BB104, Price=0.1, Supplier=mouser
C2 C15 C20 C34 C40 C58: library part "4.7uF ± 10% 50V", "4.7uF ± 10% 50V", Manufacturer=Yageo, Manufacturer Part Number=GRM188R61H225ME11J, Supplier Part Number=81-GRM188R61H225ME1J, Price=0.3, Supplier=mouser
C3 C4 C5 C9 C10 C11 C21 C22 C23 C27 C28 C29 C41 C42 C43 C48 C49 C50: library part "2.2uF ±10% 100V", "Multilayer Ceramic Capacitors MLCC - SMD/SMT 100V 2.2uF X7R 1206 20%TOL HIGH CV", Manufacturer="KYOCERA AVX", Manufacturer Part Number=12061C225MAT2A, Supplier Part Number=581-12061C225MAT2A, Price=0.5, Supplier=Mouser
C14 C17 C18 C31 C33 C36 C55 C57 C60: library part "2.2uF ± 10% 50V", "2.2uF ± 10% 50V", Manufacturer=Yageo, Manufacturer Part Number=GRM188R61H225ME11J, Supplier Part Number=81-GRM188R61H225ME1J, Price=0.3, Supplier=mouser
C37 C38 C47 C51 C52 C54: "Aluminum Electrolytic Capacitors - Radial Leaded 100volts 470uF 20% 16X35.5 7.5LS", Manufacturer=Nichicon, Manufacturer Part Number=UHE2A471MHD, Supplier Part Number=647-UHE2A471MHD, Price=2, Suplier=Mouser
D1 D4 D7: "Schottky Diodes & Rectifiers 1A, 150V, Schottky Rectifier", Manufacturer="Taiwan Semiconductor", Supplier Part Number=821-SS115, Manufacturer Part Number=SS115, Price=0.34, Supplier=Mouser
D2 D3 D5 D6 D8 D9: "Schottky Diodes & Rectifiers 1A, 40V", Manufacturer=Diodes, Supplier Part Number=621-B140HW-7, Manufacturer Part Number=B140HW-7, Price=0.42, Supplier=Mouser
J1 J4 J9: library part "Header 6 Pin_2", "WR-PHD 2.54mm  Dual Pin Header THT 06p Wurth Elektronik WR-PHD Series, Series Number 6130, 2.54mm Pitch 6 Way 2 Row Straight PCB Header, Solder Termination", Manufacturer="Wurth Elektronik", Manufacturer Part Number=61300621121, Supplier Part Number=710-61300621121, Price=0.57, Supplier=Mouser
J8: "Headers & Wire Housings WR-PHD 2.54mm Hdr 8P Dual Str Gold", Manufacturer="Wurth Elektronik", Manufacturer Part Number=61300821121, Supplier Part Number=710-61300621121, Price=0.7, Supplier=Mouser
Q1 Q2 Q3 Q4 Q5 Q6 Q7 Q8 Q9 Q10 Q11 Q12 Q13 Q14 Q15 Q16 Q17 Q18 Q19 Q20 Q21 Q22 Q23 Q24: "MOSFET Single N-Channel Power MOSFET 100V, 236A, 2.0mohm", Manufacturer=Onsemi, Manufacturer Part Number=NTMTSC002N10MCTXG, Supplier Part Number=863-TMTSC002N10MCTXG, Price=5.9, Supplier=Mouser
R1 R24 R45: library part "2.2ohm 0.25W ±1%", "2.2 ohm 0.25W ±1%", Manufacturer=Yageo, Manufacturer Part Number=RC1206FR-072R2L, Supplier Part Number=603-RC1206FR-072R2L, Price=0.12, Supplier=Mouser
R2 R3 R6 R11 R14 R25 R26 R28 R33 R35 R46 R47 R49 R54 R56: library part CSS2H-3920R-L500FE, "Current Sense Resistors - SMD 0.5mOHMS 9W 1% AEC-Q200", Manufacturer=Bourns, Supplier Part Number=652-CSS2H3920RL500FE, Manufacturer Part Number=CSS2H-3920R-L500FE, Price=2, Supplier=Mouser
R4 R18 R39 R60: library part "39 kOhms ±1% 0.8W", "39 kOhms ±1% 0.8W", Manufacturer=Yageo, Manufacturer Part Number=RT0805FRE0739KL, Supplier Part Number=603-RT0805FRE0739KL, Price=0.1, Supplier=mouser
R5 R22 R27 R44 R48 R65: library part "4.7 ohm 0.25W ±1%", "4.7 ohm 0.25W ±1%", Manufacturer=Yageo, Manufacturer Part Number=RC1206FR-074R7L, Supplier Part Number=603-RC1206FR-074R7L, Price=0.12, Supplier=Mouser
R7 R21 R29 R42 R50 R63: library part "20 ohm 0.25W ±1%", "20 ohm 0.25W ±1%", Manufacturer=Yageo, Manufacturer Part Number=RC1206FR-0720RL, Supplier Part Number=603-RC1206FR-0720RL, Price=0.12, Supplier=Mouser
R8 R9 R10 R30 R31 R32 R51 R52 R53: library part "2.2 kOhms ±1% 0.1W", "2.2 kOhms ±1% 0.1W", Manufacturer=Yageo, Manufacturer Part Number=RC0603FR-072K2L, Supplier Part Number=603-RC0603FR-072K2L, Price=0.1, Supplier=Mouser
R12 R20 R41 R62: library part "2.2 kOhms ±1% 0.8W", "2.2 kOhms ±1% 0.8W", Manufacturer=Yageo, Manufacturer Part Number=RT0805FRE072K2L, Supplier Part Number=603-RT0805FRE072K2L, Price=0.1, Supplier=mouser
R13 R15 R16 R34 R36 R37 R55 R57 R58: library part "20ohm 0.25W ±1%", "20 ohm 0.25W ±1%", Manufacturer=Yageo, Manufacturer Part Number=RC1206FR-0720RL, Supplier Part Number=603-RC1206FR-0720RL, Price=0.12, Supplier=Mouser
R17 R38 R59: library part "1 kOhms ±1% 0.1W", "1 kOhms ±1% 0.1W", Manufacturer=Yageo, Manufacturer Part Number=RC0603FR-071KL, Supplier Part Number=603-RC0603FR-071KL, Price=0.1, Supplier=Mouser
R19 R23 R40 R43 R61 R64: library part "10 kOhms ±1% 0.1W", "10 kOhms ±1% 0.1W", Manufacturer=Yageo, Manufacturer Part Number=RC0603FR-0710KL, Supplier Part Number=603-RC0603FR-0710KL, Price=0.1, Supplier=mouser
U1 U3 U5: "4A/6A, 5.7 kVrms Isolated Dual Channel Gate Driver", Manufacturer="Texas Instruments", Supplier Part Number=595-UCC21520ADW, Manufacturer Part Number=UCC21520ADW, Price=7.6, Supplier=Mouser
U2 U4 U6: "Automotive, High/Low Side, Bi-Directional Zer-Drift Current Sense Amp w/ Enhanced PWM Rejection", Manufacturer="Texas Instruments", Supplier Part Number=595-INA240A2QDRQ1, Manufacturer Part Number=INA240A2QDRQ1, Price=3.8, Supplier=Mouser

## Free pads (board coordinates)
  round 5.5 hole 3.2: 0(103.9,227.9) 0(115.9,228.4) 0(130.7,227.1)
  round 8 hole 4.2: 3(33.3,223.5) 3(41.9,222.7) 3(56.7,221.4) 3(69.7,222.4) 3(87.6,224.7)

## Via types
v1: diameter 0.8, hole 0.4, Top Layer to Bottom Layer, tented both sides, 118 vias

## Nets (pads, with @x,y where several pads share a name; then routed paths per layer and width w, separated by ;. In a path a pad name is that pad's centre, name@x,y a point inside that pad or via, vN(x,y) a via of type N, cw(c..) or ccw(c..) an arc to the next point about the centre after c; other vN are vias at no path point)
+3V3: B1.1 B2.1 B3.1 C13.2 C14.2 C17.2 C32.2 C33.2 C36.2 C56.2 C57.2 C60.2 J8.3 J8.4 U1.3 U1.8 U2.3 U2.6 U3.3 U3.8 U4.3 U4.6 U5.3 U5.8 U6.3 U6.6
+12V: C15.2 C16.2 C34.2 C35.2 C58.2 C59.2 J8.1 J8.2 R1.1 R24.1 R45.1 U1.11 U3.11 U5.11
DISABLE: J1.6 J4.6 J9.6 R16.1 R37.1 R58.1
GND: C3.1 C4.1 C5.1 C6.2 C7.2 C8.2 C9.2 C10.2 C11.2 C12.1 C13.1 C14.1 C15.1 C16.1 C17.1 C18.1 C21.1 C22.1 C23.1 C24.2 C25.2 C26.2 C27.2 C28.2 C29.2 C30.1 C31.1 C32.1 C33.1 C34.1 C35.1 C36.1 C37.2 C38.2 C41.1 C42.1 C43.1 C44.2 C45.2 C46.2 C47.2 C48.2 C49.2 C50.2 C51.2 C52.2 C53.1 C54.2 C55.1 C56.1 C57.1 C58.1 C59.1 C60.1 J8.5 J8.7 J8.8 pad.3@87.6,224.7 Q5.SOURCE Q6.SOURCE Q7.SOURCE Q8.SOURCE Q13.SOURCE Q14.SOURCE Q15.SOURCE Q16.SOURCE Q21.SOURCE Q22.SOURCE Q23.SOURCE Q24.SOURCE R8.2 R9.2 R10.2 R12.1 R19.1 R20.1 R23.1 R30.2 R31.2 R32.2 R40.1 R41.1 R43.1 R51.2 R52.2 R53.2 R61.1 R62.1 R64.1 U1.4 U1.9 U2.2 U2.7 U3.4 U3.9 U4.2 U4.7 U5.4 U5.9 U6.2 U6.7
ISENSE_U: J1.3 R17.2
ISENSE_V: J4.3 R38.2
ISENSE_W: J9.3 R59.2
NetC1_2: C1.2 C2.2 D1.C U1.16
NetC6_1: C6.1 R8.1 R16.2 U1.5
NetC7_1: C7.1 R9.1 R15.2 U1.2
NetC8_1: C8.1 R10.1 R13.2 U1.1
NetC12_2: C12.2 R19.2 U1.6
NetC19_2: C19.2 C20.2 D4.C U3.16
NetC24_1: C24.1 R30.1 R37.2 U3.5
NetC25_1: C25.1 R31.1 R36.2 U3.2
NetC26_1: C26.1 R32.1 R34.2 U3.1
NetC30_2: C30.2 R40.2 U3.6
NetC39_2: C39.2 C40.2 D7.C U5.16
NetC44_1: C44.1 R51.1 R58.2 U5.5
NetC45_1: C45.1 R52.1 R57.2 U5.2
NetC46_1: C46.1 R53.1 R55.2 U5.1
NetC53_2: C53.2 R61.2 U5.6
NetD1_A: D1.A R1.2
NetD2_A: D2.A R5.1
NetD2_C: D2.C R7.1 U1.15
NetD3_A: D3.A R22.2
NetD3_C: D3.C R21.2 U1.10
NetD4_A: D4.A R24.2
NetD5_A: D5.A R27.1
NetD5_C: D5.C R29.1 U3.15
NetD6_A: D6.A R44.2
NetD6_C: D6.C R42.2 U3.10
NetD7_A: D7.A R45.2
NetD8_A: D8.A R48.1
NetD8_C: D8.C R50.1 U5.15
NetD9_A: D9.A R65.2
NetD9_C: D9.C R63.2 U5.10
NetQ1_GATE: Q1.GATE Q2.GATE Q3.GATE Q4.GATE R5.2 R7.2
NetQ5_GATE: Q5.GATE Q6.GATE Q7.GATE Q8.GATE R21.1 R22.1
NetQ9_GATE: Q9.GATE Q10.GATE Q11.GATE Q12.GATE R27.2 R29.2
NetQ13_GATE: Q13.GATE Q14.GATE Q15.GATE Q16.GATE R42.1 R44.1
NetQ17_GATE: Q17.GATE Q18.GATE Q19.GATE Q20.GATE R48.2 R50.2
NetQ21_GATE: Q21.GATE Q22.GATE Q23.GATE Q24.GATE R63.1 R65.1
NetR17_1: R17.1 U2.5
NetR38_1: R38.1 U4.5
NetR59_1: R59.1 U6.5
OUT_U: R2.1 R3.1 R6.1 R11.1 R14.1 U2.1
OUT_V: R25.1 R26.1 R28.1 R33.1 R35.1 U4.1
OUT_W: R46.1 R47.1 R49.1 R54.1 R56.1 U6.1
PHASE_U: C1.1 C2.1 Q1.SOURCE Q2.SOURCE Q3.SOURCE Q4.SOURCE Q5.DRAIN Q6.DRAIN Q7.DRAIN Q8.DRAIN R2.2 R3.2 R6.2 R11.2 R14.2 R18.2 U1.14 U2.8
PHASE_V: C19.1 C20.1 Q9.SOURCE Q10.SOURCE Q11.SOURCE Q12.SOURCE Q13.DRAIN Q14.DRAIN Q15.DRAIN Q16.DRAIN R25.2 R26.2 R28.2 R33.2 R35.2 R39.2 U3.14 U4.8
PHASE_W: C39.1 C40.1 Q17.SOURCE Q18.SOURCE Q19.SOURCE Q20.SOURCE Q21.DRAIN Q22.DRAIN Q23.DRAIN Q24.DRAIN R46.2 R47.2 R49.2 R54.2 R56.2 R60.2 U5.14 U6.8
PWM_U_HIGH: J1.2 R13.1
PWM_U_LOW: J1.4 R15.1
PWM_V_HIGH: J4.2 R34.1
PWM_V_LOW: J4.4 R36.1
PWM_W_HIGH: J9.2 R55.1
PWM_W_LOW: J9.4 R57.1
TEMP_U: B1.2 C18.2 J1.5 R23.2
TEMP_V: B2.2 C31.2 J4.5 R43.2
TEMP_W: B3.2 C55.2 J9.5 R64.2
VIN+: C3.2 C4.2 C5.2 C9.1 C10.1 C11.1 C21.2 C22.2 C23.2 C27.1 C28.1 C29.1 C37.1 C38.1 C41.2 C42.2 C43.2 C47.1 C48.1 C49.1 C50.1 C51.1 C52.1 C54.1 Q1.DRAIN Q2.DRAIN Q3.DRAIN Q4.DRAIN Q9.DRAIN Q10.DRAIN Q11.DRAIN Q12.DRAIN Q17.DRAIN Q18.DRAIN Q19.DRAIN Q20.DRAIN R4.2
VSENSE: J8.6 R4.1 R12.2
VSENSE_U: J1.1 R18.1 R20.2
VSENSE_V: J4.1 R39.1 R41.2
VSENSE_W: J9.1 R60.1 R62.2
pads on no net: U1.7 U1.12 U1.13 U2.4 U3.7 U3.12 U3.13 U4.4 U5.7 U5.12 U5.13 U6.4
copper on no net:
  other v1: 141.5,222.1 142.5,222.1 143.5,222.1 141.5,223.1 142.5,223.1 143.5,223.1 138.3,224.1 139.3,224.1 140.3,224.1 141.3,224.1 142.3,224.1 143.3,224.1 144.3,224.1 138.3,225.1 139.3,225.1 140.3,225.1 141.3,225.1 142.3,225.1 143.3,225.1 144.3,225.1 138.3,226.1 139.3,226.1 140.3,226.1 141.3,226.1 142.3,226.1 143.3,226.1 144.3,226.1 145.3,226.1 138.3,227.1 139.3,227.1 140.3,227.1 141.3,227.1 142.3,227.1 143.3,227.1 144.3,227.1 145.3,227.1 146.3,227.1 147.3,227.1 148.3,227.1 149.3,227.1 150.3,227.1 151.3,227.1 152.3,227.1 138.3,228.1 139.3,228.1 140.3,228.1 141.3,228.1 142.3,228.1 143.3,228.1 144.3,228.1 145.3,228.1 146.3,228.1 147.3,228.1 148.3,228.1 149.3,228.1 150.3,228.1 151.3,228.1 152.3,228.1 138.3,229.1 139.3,229.1 140.3,229.1 141.3,229.1 142.3,229.1 143.3,229.1 144.3,229.1 145.3,229.1 146.3,229.1 147.3,229.1 148.3,229.1 149.3,229.1 150.3,229.1 151.3,229.1 152.3,229.1 138.3,230.1 139.3,230.1 140.3,230.1 141.3,230.1 142.3,230.1 143.3,230.1 144.3,230.1 145.3,230.1 146.3,230.1 147.3,230.1 148.3,230.1 149.3,230.1 150.3,230.1 151.3,230.1 152.3,230.1 138.3,231.1 139.3,231.1 140.3,231.1 141.3,231.1 142.3,231.1 143.3,231.1 144.3,231.1 145.3,231.1 146.3,231.1 147.3,231.1 148.3,231.1 149.3,231.1 150.3,231.1 151.3,231.1 152.3,231.1 138.3,232.1 139.3,232.1 140.3,232.1 141.3,232.1 142.3,232.1 143.3,232.1 144.3,232.1 145.3,232.1 146.3,232.1 147.3,232.1 148.3,232.1 149.3,232.1 150.3,232.1 151.3,232.1 152.3,232.1

## Keep-outs
Keep-Out Layer:
  lines w0.254: 372.2,0.408 372.2,183.048 ; 373,0.008 372.992,0 15.5,0 15.5,182.648 373,182.648

## Other copper
Top Layer:
  pour cut-out: 87.644,219.667 ccw(c87.644,224.667) 92.644,224.667 ccw(c87.644,224.667) 87.644,229.667 ccw(c87.644,224.667) 82.644,224.667 ccw(c87.644,224.667)

## Silkscreen, mask and mechanical layers (free items; w line width, h text height)
Mechanical 1:
  lines w0.1: 142.1,227.174 142.476,227.55
  lines w0.254: 142.075,224.175 142.125,224.125
Assembly Text Bottom:
  lines w5: 306,138.8 306,163.8
  lines w7: 251.6,143.5 251.6,172.442 298.1,172.346 ; 267.801,151.293 304.7,151.2 ; 325.9,163 326,140.4

## Dimensions
301.4,76.8 to 301.5,56.9 on Top Paste
301.4,96.7 to 301.5,76.8 on Top Paste
301.4,116.6 to 301.5,96.7 on Top Paste
301.4,136.5 to 301.5,116.6 on Top Paste
301.4,156.4 to 301.5,136.5 on Top Paste